# EAGLE board DHB-10_Serial_Converter (EAGLE 7.5.0)
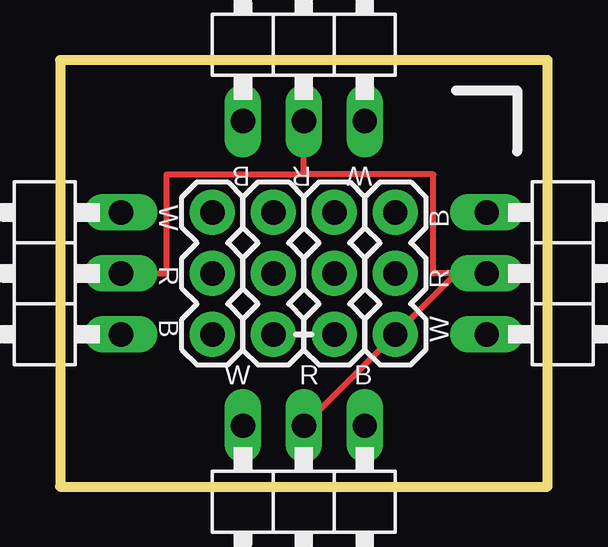
[diagram p0: board, top side]
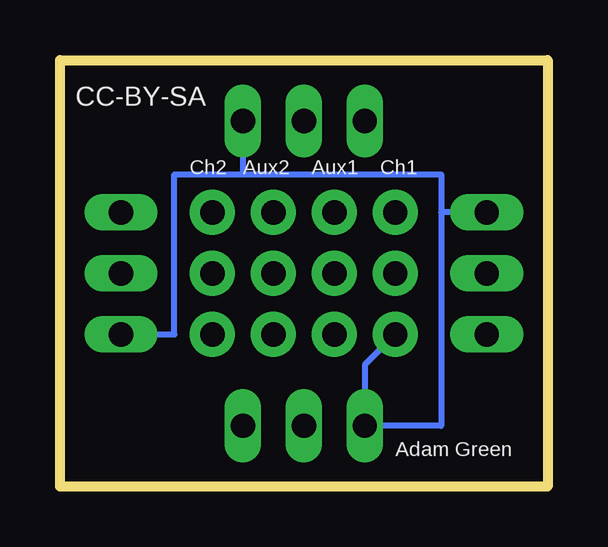
[diagram p1: board, bottom side, seen from below]

Size 20.32 x 17.78 mm. Coordinates in mm from the lower left corner, seen from the top.
Outline: 0,0 20.32,0 20.32,17.78 0,17.78 0,0
Copper layers (1*16): Top 0.0356mm / dielectric 1.5011mm / Bottom 0.0356mm
Design rules "LaenPCBOrder": minimum track width 6mil, minimum drill 13mil, track to track 6mil, track to pad 6mil, pad to pad 6mil, via to via 6mil, smd to smd 6mil, copper to edge 15mil, drill to drill 6mil, minimum pad ring 7mil, minimum via ring 7mil, stop-mask expansion 3mil, vias tented up to drill 0mil, thermal gap 10mil

## Footprints (pad centres in the part's own frame; a part is rotated, then mirrored left to right if it is on the bottom)
1X03/90 = drill 1.016 long: 1 -2.54,-3.81; 2 0,-3.81; 3 2.54,-3.81
1X03 = drill 1.016 pad 1.88: 1 0,0; 2 2.54,0; 3 5.08,0

## Placement (x,y rotation side)
E$1  [1X03/90]  10.16,19.05 0 top
E$2  [1X03]  6.35,6.35 90 top
E$3  [1X03]  8.89,6.35 90 top
E$4  [1X03]  11.43,6.35 90 top
E$5  [1X03]  13.97,6.35 90 top
E$6  [1X03/90]  10.16,-1.27 180 top
E$7  [1X03/90]  21.59,8.89 270 top
E$8  [1X03/90]  -1.27,8.89 90 top

## Library data of the parts
E$1 E$6-E$8 = pinhead
E$2-E$5 = SparkFun-Capacitors

## Nets
S$1: E$1.3 E$2.1 E$6.3 E$7.3 E$8.3
S$2: E$1.2 E$5.1 E$6.2 E$7.2 E$8.2

## Tracks (layer width: path | path; a pad name or v marks a point on that pad's centre or on a via)
S$1
  Bottom 0.254: E$2.1 7.62,5.08 E$6.3 4.45,2.54 4.45,11.43 | E$8.3 4.45,11.43 | E$1.3 12.7,13.02 | 12.7,13.02 4.45,13.02 4.45,11.43 | E$7.3 15.56,6.35 15.56,13.02 12.7,13.02
S$2
  Top 0.152: 16.51,8.89 E$7.2
  Top 0.254: E$6.2 E$5.1 16.51,8.89 | E$7.2 15.56,8.89 15.56,13.02 10.16,13.02 | 10.16,13.02 E$1.2 | E$8.2 4.45,8.89 4.45,13.02 10.16,13.02

## Text on the board
tNames: B | R | W | W | B | R | R | B | W | W | R | B
bNames: CC-BY-SA | Ch1 | Aux1 | Aux2 | Ch2 | Adam Green